# Altium PCB temperatureSensor.PcbDoc (part 1 of 3)
Units mm, origin at the board's own origin, x right, y up, seen from the top; angles counter-clockwise.
Board outline 80 x 46 mm, 2 copper layers (Top Layer, Bottom Layer); 50 components, 32 nets, 187 pads, 128 vias.
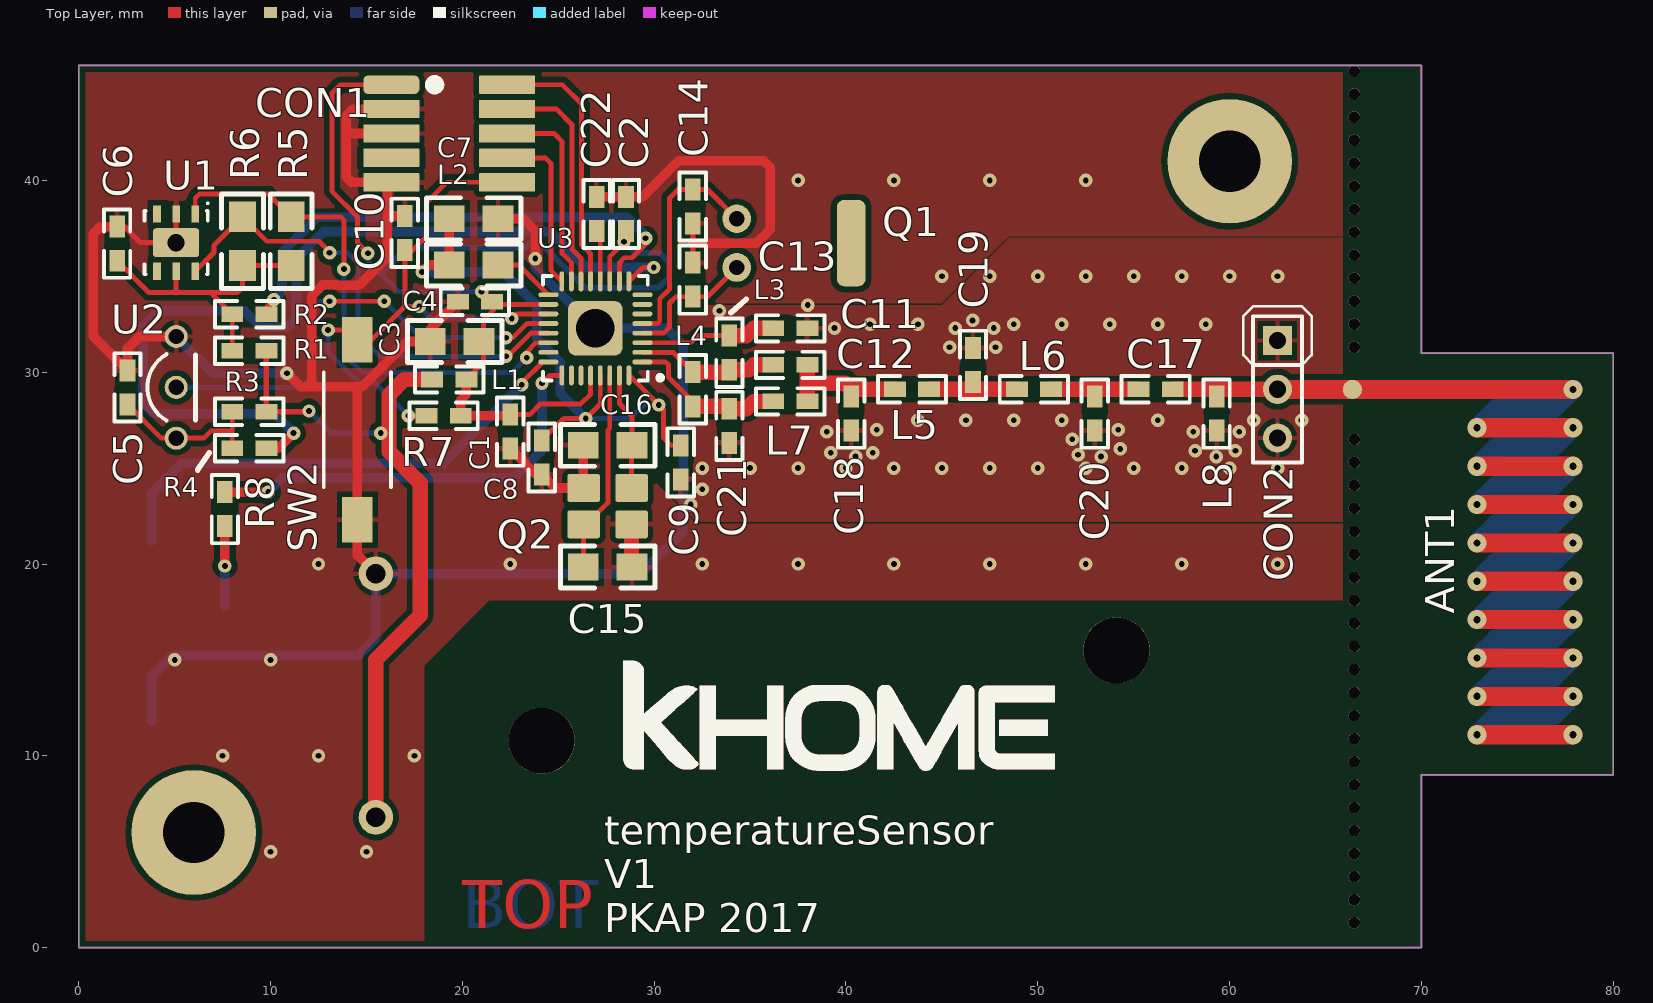
[diagram p0: Top Layer view]
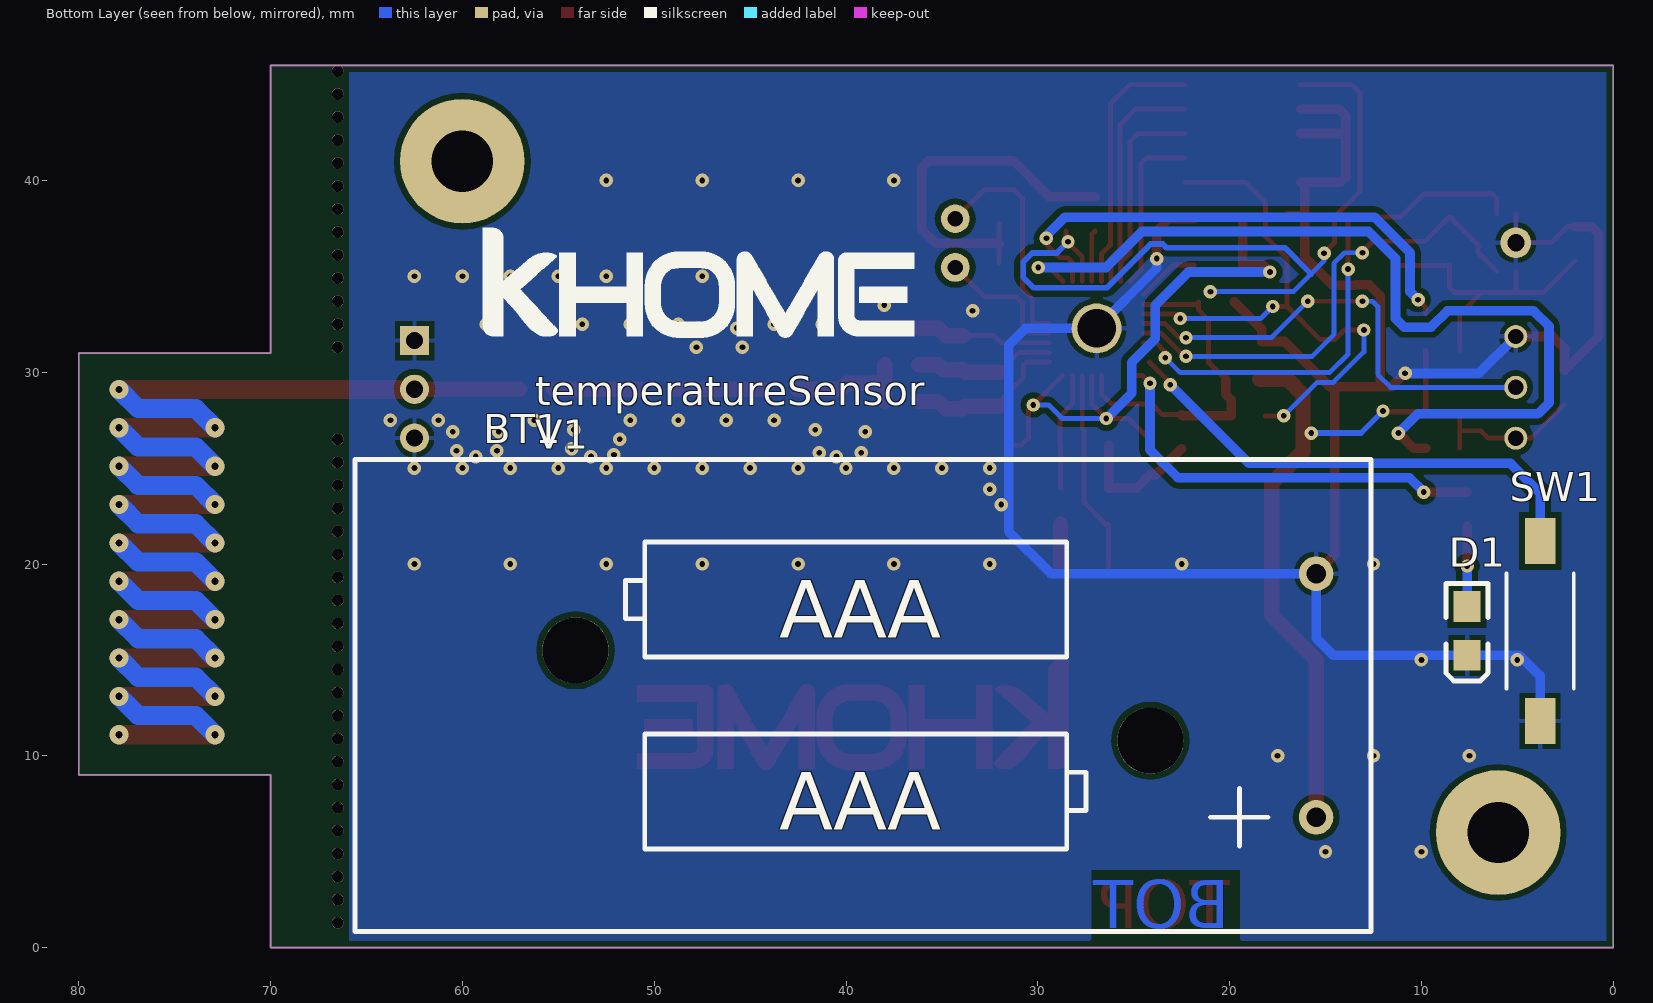
[diagram p1: Bottom Layer view, seen from below]

## Layer stack, top to bottom
Top Solder: solder mask 0.0102, Solder Resist, Dk 3.5
Top Layer: signal copper 0.0356
Dielectric 1: dielectric 0.32, FR-4, Dk 4.8
Bottom Layer: signal copper 0.0356
Bottom Solder: solder mask 0.0102, Solder Resist, Dk 3.5

## Board outline
0,0 70,0 70,9 80,9 80,31 70,31 70,46 0,46

## Design rules (kind name [scope] priority, off if disabled: settings)
BoardOutlineClearance [All] p1: gap=0.35
Clearance Clearance_1 [InPoly] p1: gap=0.3
Clearance [All] p2: gap=0.254
MaxMinImpedance [InNetClass('RF')] p1: minimum=49,00 maximum=51,00
PolygonConnect PolygonConnect_Via [All vs IsVia] p1: connectstyle=Direct reliefconductorwidth=0.254 reliefentries=4 polygonreliefangle="90 Angle" airgapwidth=0.254
PolygonConnect [All] p2: connectstyle=Relief reliefconductorwidth=0.254 reliefentries=4 polygonreliefangle="90 Angle" airgapwidth=0.254
RoutingVias [All] p1: holewidth=0.3 width=0.7 viastyle="Through Hole" minholewidth=0.3 minwidth=0.7 maxholewidth=15 maxwidth=15
SolderMaskExpansion [All] p1: expansion=0.102
Width [All] p1: maxlimit=10 minlimit=0.254 preferedwidth=0.4
30 further rules are at their usual default settings.

## Classes and differential pairs
net class RF: CC_RF_N CC_RF_P CC_RF_TX NetANT1_1 NetC12_1 NetC17_2 NetC19_1

## Components (designator, comment, footprint, x,y, rotation, side; value= is the part's Value field where it differs from the comment)
ANT1 "868 MHz" Ant-868-Helical 66.4,29.1 r0 top
BT1 "2x AAA" Keystone-2468 15.49,13.145 r180 bottom
C1 "100n" 0603_N 22.5,26.9 r90 top
C2 "100n" 0603_N 28.53,38.25 r270 top
C3 "22u" 0805_N 19.6,31.6 r0 top
C4 "100n" 0603_N 20.65,33.675 r0 top
C5 "100n" 0603_N 2.54,29.21 r270 top
C6 "100n" 0603_N 2,36.7 r270 top
C7 "22u" 0805_N 20.585,38 r180 top
C8 "100n" 0603_N 24.141,25.554 r90 top
C9 "100n" 0603_N 31.38,25.3 r90 top
C10 "100n" 0603_N 17,37.264 r270 top
C11 "100p" 0603_N 37.095,32.285 r0 top
C12 "3.3p" 0603_N 37.095,30.38 r180 top
C13 "10p" 0603_N 32.015,34.825 r270 top
C14 "10p" 0603_N 32.015,38.635 r90 top
C15 "15p" 0805_N 27.57,19.839 r180 top
C16 "15p" 0805_N 27.57,26.189 r0 top
C17 "1p" 0603_N 56.145,29.11 r180 top
C18 "2.7p" 0603_N 40.27,27.84 r270 top
C19 "6.2p" 0603_N 46.62,30.38 r90 top
C20 "3.0p" 0603_N 52.97,27.84 r270 top
C21 "3.3p" 0603_N 33.92,27.205 r90 top
C22 "1u" 0603_N 27.006,38.25 r270 top
CON1 "Cortex Debug" cortex-dbg 19.315,42.445 r0 top
CON2 "1x3" Header_254_1x3_male 62.495,31.65 r0 top
D1 "LED Red" 0805_LED 7.62,16.51 r270 bottom
L1 "Ferrite Bead" 0603_N 19.315,29.618 r0 top
L2 "6.8 µH" 0805_N 20.585,35.587 r180 top
L3 "8.2nH" 0603_N 33.92,31.015 r270 top
L4 "22nH" 0603_N 32.015,29.11 r270 top
L5 "6.8nH" 0603_N 43.445,29.11 r0 top
L6 "6.8nH" 0603_N 49.795,29.11 r0 top
L7 "8.2nH" 0603_N 37.095,28.475 r0 top
L8 "12nH" 0603_N 59.32,27.84 r90 top
Q1 "Crystal" AB38t 34.301,35.46 r0 top
Q2 "Quartz 20 MHz" LFXTAL058124 27.57,23.014 r0 top
R1 "DNP" 0603_N 8.89,31.115 r180 top
R2 "0R" 0603_N 8.89,33.02 r0 top
R3 "DNP" 0603_N 8.89,27.94 r180 top
R4 "0R" 0603_N 8.89,26.035 r0 top
R5 "10k" 0805_N 11.075,36.83 r90 top
R6 "10k" 0805_N 8.535,36.83 r90 top
R7 "100k" 0603_N 19.025,27.725 r180 top
R8 "1k" 0603_N 7.62,22.86 r270 top
SW1 "Push Button" FSMSM 3.81,16.51 r90 bottom
SW2 "Push Button" FSMSM 14.525,27 r90 top
U1 "Humidity & Temperature" SI7020-DFN6 5.075,36.755 r270 top
U2 "temperature sensor" LMT85-TO92 5.08,29.21 r270 top
U3 "CC1310" CC1310F128RHB-QFN32 26.935,32.285 r180 top

## Footprints (in the part's own frame and the unit in brackets; to place one, negate y for a bottom-side part, rotate by r counter-clockwise, add the part's x,y. Pads: shape width x height; smd on the part's side, far side on the other; paste and mask are expansions set on the pad)
0603_N [mil] "0603 normal hand soldering size"
  rect 45x32 smd: 1(-35,0) 2(35,0)
  silkscreen extent -70,-27 70,27, body extent -67,-24 67,24, height 22
0805_LED [mil] "0805 normal hand soldering size"
  rect 63x55 smd: A(-50,0) K(50,0)
  silkscreen extent -97,-43 102,43, body extent -94,-33 94,33, height 25
0805_N [mil] "0805 normal hand soldering size"
  rect 63x55 smd: 1(-50,0) 2(50,0)
  silkscreen extent -97,-43 97,43, body extent -94,-33 94,33, height 25
AB38t [mm]
  round 1.5 hole 0.8: 1(0,0) 2(0,2.54)
  rrect50% 1.5x4.5 smd: 3(5.969,1.27)
  body extent 2.54,-0.33 10.84,2.87, height 3.2
Ant-868-Helical [mm] "868 MHz Helical PCB Antenna"
  round 1 smd: 1(0,0)
  Top Layer lines w1: 0,0 0.35,0 11.5,0 ; 6.5,-18 11.5,-18 ; 6.5,-14 11.5,-14 ; 6.5,-12 11.5,-12 ; 6.5,-10 11.5,-10 ; 6.5,-8 11.5,-8 ; 6.5,-6 11.5,-6 ; 6.5,-4 11.5,-4 ; 6.5,-2 11.5,-2 ; 6.5,-16 11.5,-16 6.5,-16
  Bottom Layer lines w1: 6.5,-18 7.5,-17 10.5,-17 11.5,-16 ; 6.5,-16 7.5,-15 10.5,-15 11.5,-14 ; 6.5,-14 7.5,-13 10.5,-13 11.5,-12 ; 6.5,-12 7.5,-11 10.5,-11 11.5,-10 ; 6.5,-10 7.5,-9 10.5,-9 11.5,-8 ; 6.5,-8 7.5,-7 10.5,-7 11.5,-6 ; 6.5,-6 7.5,-5 10.5,-5 11.5,-4 ; 6.5,-4 7.5,-3 10.5,-3 11.5,-2 ; 6.5,-2 7.5,-1 10.5,-1 11.5,0
CC1310F128RHB-QFN32 [mm] "QFN, 32-Leads, Body 5,00x5,00mm, Pitch 0,50mm, Thermal Pad 3,45x3,45mm, IPC Low Density"
  oval 1.05x0.25 smd: 1(-2.45,1.75) 2(-2.45,1.25) 3(-2.45,0.75) 4(-2.45,0.25) 5(-2.45,-0.25) 6(-2.45,-0.75) 7(-2.45,-1.25) 8(-2.45,-1.75) 17(2.45,-1.75) 18(2.45,-1.25) 19(2.45,-0.75) 20(2.45,-0.25) 21(2.45,0.25) 22(2.45,0.75) 23(2.45,1.25) 24(2.45,1.75)
  oval 0.25x1.05 smd: 9(-1.75,-2.45) 10(-1.25,-2.45) 11(-0.75,-2.45) 12(-0.25,-2.45) 13(0.25,-2.45) 14(0.75,-2.45) 15(1.25,-2.45) 16(1.75,-2.45) 25(1.75,2.45) 26(1.25,2.45) 27(0.75,2.45) 28(0.25,2.45) 29(-0.25,2.45) 30(-0.75,2.45) 31(-1.25,2.45) 32(-1.75,2.45)
  rrect30% 2.85x2.85 / inner round 2.6 / far side round 2.6 hole 2: G(0,0)
  silkscreen extent -3.5,-2.73 2.73,2.73, body extent -2.63,-2.63 2.63,2.63, height 1
cortex-dbg [mm]
  rrect50% 2.92x0.95 smd: 1(-3.02,2.54)
  rrect5% 2.92x0.95 smd: 2(3.02,2.54) 3(-3.02,1.27) 4(3.02,1.27) 5(-3.02,0) 6(3.02,0) 7(-3.02,-1.27) 8(3.02,-1.27) 9(-3.02,-2.54) 10(3.02,-2.54)
  silkscreen extent -1.02,2.29 -0.51,2.79, body extent -2.92,-3.18 2.92,3.17, height 6.16
FSMSM [mm]
  rect 2.39x1.6 smd: 1(-4.695,0) 2(4.695,0)
  silkscreen extent -3,-1.75 3,1.75, body extent -4.98,-1.75 4.98,1.75, height 4.45
Header_254_1x3_male [mil]
  rect 60x60 hole 35: 1(0,0)
  round 60 hole 35: 2(0,-100) 3(0,-200)
  silkscreen extent -70,-250 70,70, body extent -49,-250 50,49, height 402
Keystone-2468 [mm] "Double AAA battery holder"
  round 1.8 hole 1.02: N(0,6.35) P(0,-6.35)
  round 3.45 hole 3.45 unplated: NC(-38.61,2.35) NC(-8.64,-2.35)
  silkscreen extent -50.12,-12.29 2.87,12.29, body extent -50.12,-12.3 2.86,12.29, height 13.43
LFXTAL058124 [mm] "Crystal SMD 3.2x2.5mm"
  rrect15% 1.7x1.45 smd: G(-1.25,0.95) G(1.25,-0.95) Q1(1.25,0.95) Q2(-1.25,-0.95)
  body extent -1.7,-1.35 1.7,1.35, height 0.8
LMT85-TO92 [mm] "TO92 Package"
  round 1.2 hole 0.8: 1(-2.65,0) 2(0,0) 3(2.65,0)
  silkscreen extent -1.73,-1.5 1.73,1
SI7020-DFN6 [mm] "SON, 6-Leads, Body 3,00x3,00mm, Pitch 1,00mm, Thermal Pad 2,40x1,50mm, IPC Low Density"
  rect 0.9x0.4 smd: 1(-1.49,1) 2(-1.49,0) 3(-1.49,-1) 4(1.49,-1) 5(1.49,0) 6(1.49,1)
  rrect20% 1.5x2.4 / inner round 1.6 / far side round 1.6 hole 0.9: 7(0,0)
  silkscreen extent -2.1,-1.65 1.65,1.7, body extent -1.5,-1.5 1.5,1.5, height 1.21

## Part data
ANT1: library part ANT-868-Helical, "868 MHz Helical PCB Antenna, see TI swra416.pdf"
BT1: library part Battery-AAA-Double, "Double AAA Battery Holder"
C1 C2 C4 C5 C6 C8 C9 C10: library part 100n_50V_0603, "100n 50V 0603"
C3 C7: library part 22u_25V_0805, "22u 25V 0805"
C11: library part 100p_50V_0603, "100p 50V 0603"
C12 C21: library part 3p3_50V_0603, "3p3 50V 0603"
C13 C14: library part 10p_50V_0603, "10p 50V 0603"
C15 C16: library part 10p_50V_0805, "15p 50V 0805"
C17: library part 100p_50V_0603, "1p 50V 0603"
C18: library part 3p3_50V_0603, "2p7 50V 0603"
C19: library part 3p3_50V_0603, "6p2 50V 0603"
C20: library part 3p3_50V_0603, "3p 50V 0603"
C22: library part 1u_50V_0603, "1u 50V 0603"
CON1: library part Cortex-DBG
CON2: library part Header_1x03_male, "Male Connector 1x3"
D1: library part LED-STD-RED-0805, "Standard LED Red 0805"
L1: library part Inductor_General_Purpose_0603
L2: library part Inductor_General_Purpose_0603, "Chip Inductor 0805"
L3 L7: library part Inductor_General_Purpose_0603, "8.2nH Inductor"
L4: library part Inductor_General_Purpose_0603, "22nH Inductor"
L5 L6: library part Inductor_General_Purpose_0603, "6.8H Inductor"
L8: library part Inductor_General_Purpose_0603, "Inductor for PCB Antenna compensation"
Q1: library part AB38T-32.768KHZ, "AB38T-32.768KHZ"
Q2: library part LFXTAL058124, "Standard 3.2 x 2.5mm SMD crystal in a ceramic package with a  seam sealed metal lid, hermetically sealed."
R1 R2 R3 R4: library part 0R_100mW_0603, "0R 100mW 0603"
R5 R6: library part 10k_125mW_0805, "10k 125mW 0805"
R7: library part 100k_100mW_0603, "100k 100mW 0603"
R8: library part 1k_100mW_0603, "1k 100mW 0603"
SW1 SW2: library part Switch-FSMSM, "Taster, Nicht beleuchtet, 24 V, 50 mA, 180 gf, Baureihe FSMSM, AlcoSwitch"
U1: library part SI7020, "I2C HUMIDITY AND TEMPERATURE SENSOR"
U2: library part LMT85-TO92, "Analog Temperature Sensors with Class-AB Output"
U3: library part CC1310F128RHB, "CC1310 SimpleLink™ Ultra-Low-Power Sub-1 GHz Wireless MCU"

## Free pads (board coordinates)
  round 0.6 hole 0.6 unplated mask+0: 0(66.5,1.3) 0(66.5,2.5) 0(66.5,3.7) 0(66.5,4.9) 0(66.5,6.1) 0(66.5,7.3) 0(66.5,8.5) 0(66.5,9.7) 0(66.5,10.9) 0(66.5,12.1) 0(66.5,13.3) 0(66.5,14.5) 0(66.5,15.7) 0(66.5,16.9) 0(66.5,18.1) 0(66.5,19.3) 0(66.5,20.5) 0(66.5,21.7) 0(66.5,22.9) 0(66.5,24.1) 0(66.5,25.3) 0(66.5,26.5) 0(66.5,31.3) 0(66.5,32.5) 0(66.5,33.7) 0(66.5,34.9) 0(66.5,36.1) 0(66.5,37.3) 0(66.5,38.5) 0(66.5,39.7) 0(66.5,40.9) 0(66.5,42.1) 0(66.5,43.3) 0(66.5,44.5) 0(66.5,45.7)
  round 6.5 hole 3.2 unplated: MOUNT1(6,6) MOUNT2(60,41)

## Via types
v1: diameter 0.7, hole 0.3, Top Layer to Bottom Layer, tented both sides, 109 vias
v2: diameter 1, hole 0.38, Top Layer to Bottom Layer, tented both sides, 19 vias

## Nets (pads, with @x,y where several pads share a name; then routed paths per layer and width w, separated by ;. In a path a pad name is that pad's centre, name@x,y a point inside that pad or via, vN(x,y) a via of type N, cw(c..) or ccw(c..) an arc to the next point about the centre after c; other vN are vias at no path point)
3V3: BT1.P L1.1 R1.1 R3.1 | length 35.9
  Top Layer w0.3: R1.1@9.779,31.115 R3.1@9.779,27.94 12.04,27.94 v1(12.005,27.975)
  Top Layer w0.8: BT1.P@15.49,6.795 15.49,15.015 17.8,17.325 17.8,24.225 16.171,25.854 16.171,28.821 16.968,29.618 L1.1@18.426,29.618
  Bottom Layer w0.3: v1(12.005,27.975) 13.155,26.825 v1(15.75,26.825)
CC_RF_N: C12.2 L3.2 L4.1 U3.2 | length 7.4
  Top Layer w0.254: U3.2@29.385,31.035 30.979,31.035 L4.1@32.015,29.999 ; L3.2@33.793,29.999 L3.2@33.92,30.126
  Top Layer w0.8: L4.1@32.015,29.999 L3.2@33.793,29.999 ; L3.2@33.92,30.126 34.936,30.126 35.19,30.38 C12.2@36.206,30.38
CC_RF_P: C21.2 L4.2 L7.1 U3.1 | length 8.5
  Top Layer w0.254: U3.1@29.385,30.535 30.59,30.535 ; 30.59,30.527 30.598,30.527 30.745,30.38 30.745,29.745 32.015,28.475 L4.2@32.015,28.221 ; C21.2@33.793,28.221 C21.2@33.92,28.094
  Top Layer w0.8: L4.2@32.015,28.221 C21.2@33.793,28.221 ; C21.2@33.92,28.094 34.809,28.094 35.19,28.475 L7.1@36.206,28.475
CC_RF_TX: C11.1 L3.1 U3.3 | length 7.1
  Top Layer w0.254: U3.3@29.385,31.535 31.9,31.535 32.269,31.904 L3.1@33.92,31.904
  Top Layer w0.8: L3.1@33.92,31.904 34.809,31.904 35.19,32.285 C11.1@36.206,32.285
DCDC_SW: L2.1 U3.17 | length 3.3
  Top Layer w0.254: L2.1@21.855,35.587 22.933,35.587 U3.17@24.485,34.035
GND: BT1.N C1.1 C2.1 C3.1 C4.1 C5.1 C6.1 C7.1 C8.1 C9.1 C10.1 C11.2 C13.1 C14.1 C15.1 C16.1 C18.2 C19.2 C20.2 C21.1 C22.1 CON1.3 CON1.5 CON1.9 CON2.1 CON2.3 D1.K L8.1 Q2.G SW1.1 SW2.1 U1.2 U1.7 U2.1 U3.G | length 158.3
  Top Layer w0.254: C6.1@2,37.589 2.386,37.589 3.22,36.755 U1.7@5.075,36.755 U1.2@5.075,38.245 ; C15.1@28.82,19.859 C15.1@28.84,19.839 ; C13.1@32.015,35.714 32.015,36.7 C14.1@32.015,37.746
  Top Layer w0.5: C6.1@2,37.589 1.139,37.589 0.75,37.2 0.75,31.889 C5.1@2.54,30.099 2.54,31.24 3.16,31.86 U2.1@5.08,31.86 ; v1(10.85,29.95) 11.55,29.25 12.1,29.25 ; BT1.N@15.49,19.495 14.525,20.46 SW2.1@14.525,22.305 14.525,29.15 14.425,29.25 ; CON1.9@16.295,39.905 CON1.9@16.09,39.905 ; CON1.5@16.295,42.445 13.995,42.445 13.95,42.4 ; CON1.3@16.295,43.715 14.29,43.715 13.95,43.375 13.95,42.4 ; C10.1@17,38.153 16.118,38.153 16.09,38.125 ; C4.1@19.761,33.675 18.33,32.244 C3.1@18.33,31.6 17.138,31.6 14.788,29.25 14.425,29.25 ; C7.1@21.855,38 23.175,38 23.8,37.375 v1(23.8,35.925) ; C1.1@22.5,26.011 23.846,24.665 C8.1@24.141,24.665 24.842,23.964 Q2.G@26.32,23.964 26.3,23.984 C16.1@26.3,26.189 ; C22.1@27.006,39.139 C2.1@28.53,39.139 29.389,39.139 31.275,41.025 35.7,41.025 36.05,40.675 36.05,37.45 35.314,36.714 32.029,36.714 32.015,36.7 ; 12.1,29.25 12.146,29.296 12.146,33.98 12.722,34.556 13.429,34.556 13.462,34.523 14.605,34.523 16.09,36.007 16.09,38.125 ; 12.1,29.25 14.425,29.25 ; 13.95,42.4 13.95,40.175 14.22,39.905 CON1.9@16.09,39.905 ; 16.09,38.125 CON1.9@16.09,39.905
  Top Layer w0.8: C15.1@28.82,19.859 Q2.G@28.82,22.064
  Bottom Layer w0.5: SW1.1@3.81,11.815 3.81,14.16 4.89,15.24 D1.K@7.62,15.24 14.59,15.24 15.49,16.14 BT1.N@15.49,19.495 29.32,19.495 31.525,21.7 31.525,31.4 30.64,32.285 U3.G@26.935,32.285 23.8,35.42 v1(23.8,35.925) ; U2.1@5.08,31.86 6.99,29.95 v1(10.85,29.95)
  other v1: 10,5 15,5 7.5,10 12.5,10 17.5,10 5,15 10,15 12.5,20 22.5,20 32.5,20 37.5,20 42.5,20 47.5,20 52.5,20 57.5,20 62.5,20 31.9,23.1 32.5,23.9 32.5,25 35,25 37.5,25 40,25 42.5,25 45,25 47.5,25 50,25 52.5,25 55,25 57.5,25 60,25 62.5,25 40.5,25.6 53.3,25.6 59.3,25.6 52.1,25.7 39.2,25.8 41.4,25.8 58.2,25.9 60.3,25.9 54.3,26 51.8,26.5 39,26.9 58.1,26.9 60.5,26.9 41.6,27 54.2,27 43.75,27.5 46.25,27.5 48.75,27.5 51.25,27.5 56.25,27.5 61.25,27.5 63.75,27.5 45.4,31.3 47.8,31.3 39.4,32.3 45.7,32.3 47.7,32.3 41.25,32.5 43.75,32.5 48.75,32.5 51.25,32.5 53.75,32.5 56.25,32.5 58.75,32.5 46.6,32.7 33.4,33.2 38,33.5 45,35 47.5,35 50,35 52.5,35 55,35 57.5,35 60,35 62.5,35 37.5,40 42.5,40 47.5,40 52.5,40
JTAG_TCK: CON1.4 U3.14 | length 12.1
  Top Layer w0.254: CON1.4@22.335,43.715 24.91,43.715 25.711,42.914 25.711,36.421 26.177,35.955 26.177,35.94 ; U3.14@26.185,34.735 26.185,35.94
JTAG_TDI: CON1.8 U3.16 | length 8.8
  Top Layer w0.254: CON1.8@22.335,41.175 24.325,41.175 24.625,40.875 24.625,35.295 U3.16@25.185,34.735
JTAG_TDO: CON1.6 U3.15 | length 10.5
  Top Layer w0.254: CON1.6@22.335,42.445 24.78,42.445 25.203,42.022 25.203,36.196 25.677,35.722 25.677,35.69 ; U3.15@25.685,34.735 25.685,35.69
JTAG_TMS: CON1.2 U3.13 | length 13.7
  Top Layer w0.254: CON1.2@22.335,44.985 25.215,44.985 26.219,43.981 26.219,36.632 26.442,36.408 26.458,36.408 26.677,36.19 ; U3.13@26.685,34.735 26.685,36.19
LMT_SNS: U2.2 U3.20 | length 24.4
  Top Layer w0.254: v1(13.076,33.702) 15.923,33.702 v1(15.925,33.7) ; v1(22.275,31.8) 22.625,31.8 23.352,32.527 23.36,32.527 ; 23.36,32.535 U3.20@24.485,32.535
  Bottom Layer w0.254: U2.2@5.08,29.21 11.61,29.21 12.269,29.869 12.269,33.419 12.552,33.702 v1(13.076,33.702) ; v1(15.925,33.7) 17.825,31.8 v1(22.275,31.8)
NetANT1_1: ANT1.1 C17.1 CON2.2 L8.2 | length 9.7
  Top Layer w0.8: C17.1@57.034,29.11 CON2.2@62.495,29.11
  Top Layer w1: CON2.2@62.495,29.11 62.505,29.1 ANT1.1@66.4,29.1 ANT1.1@66.75,29.1
  other v2: 72.9,11.1 77.9,11.1 72.9,13.1 77.9,13.1 72.9,15.1 77.9,15.1 72.9,17.1 77.9,17.1 72.9,19.1 77.9,19.1 72.9,21.1 77.9,21.1 72.9,23.1 77.9,23.1 72.9,25.1 77.9,25.1 72.9,27.1 77.9,27.1 77.9,29.1
NetC5_2: C5.2 R3.2 R4.1 U2.3 | length 8.2
  Top Layer w0.254: C5.2@2.54,28.321 4.301,26.56 U2.3@5.08,26.56 6.51,26.56 6.9,26.95 7.975,26.95 ; R4.1@8.001,26.035 R3.2@8.001,27.94
NetC6_2: C6.2 R1.2 R2.1 R5.1 R6.1 U1.5 | length 15.6
  Top Layer w0.254: C6.2@2,35.811 3.661,34.15 5.125,34.15 ; U1.5@5.075,35.265 5.075,34.2 5.125,34.15 ; R1.2@8.001,31.115 R2.1@8.001,33.02 6.871,34.15 ; R5.1@11.075,35.56 R6.1@8.535,35.56 8.535,34.435 8.25,34.15 6.871,34.15 ; 5.125,34.15 6.871,34.15
NetC12_1: C12.1 C18.1 L5.1 L7.2 | length 6.6
  Top Layer w0.8: L7.2@37.984,28.475 37.984,29.428 ; C12.1@37.984,30.38 37.984,29.428 ; L5.1@42.556,29.11 40.27,29.11 39.953,29.428 37.984,29.428
NetC13_2: C13.2 Q1.1 U3.4 | length 7.1
  Top Layer w0.254: U3.4@29.385,32.035 30.495,32.035 30.799,32.339 30.799,33.609 31.126,33.936 C13.2@32.015,33.936 32.777,33.936 Q1.1@34.301,35.46
NetC14_2: C14.2 Q1.2 U3.5 | length 11.9
  Top Layer w0.254: U3.5@29.385,32.535 30.172,32.535 30.291,32.654 30.291,33.819 30.8,34.328 30.8,39.075 31.249,39.524 C14.2@32.015,39.524 32.777,39.524 Q1.2@34.301,38
NetC15_2: C15.2 Q2.Q2 U3.30 | length 10.7
  Top Layer w0.254: C15.2@26.3,19.839 26.32,19.859 Q2.Q2@26.32,22.064 26.47,22.064 27.589,23.183 27.589,26.975 27.685,27.071 U3.30@27.685,29.835
NetC16_2: C16.2 Q2.Q1 U3.31 | length 6.1
  Top Layer w0.254: 28.185,29.13 U3.31@28.185,29.835 ; 28.193,29.13 28.193,28.36 28.84,27.713 C16.2@28.84,26.189 28.82,26.169 Q2.Q1@28.82,23.964
NetC17_2: C17.2 C20.1 L6.2 | length 4.6
  Top Layer w0.8: L6.2@50.684,29.11 C17.2@55.256,29.11
NetC19_1: C19.1 L5.2 L6.1 | length 4.6
  Top Layer w0.8: L5.2@44.334,29.11 L6.1@48.906,29.11
NetC22_2: C22.2 U3.12 | length 2.7
  Top Layer w0.254: C22.2@27.006,37.361 27.185,37.182 U3.12@27.185,34.735
NetD1_A: D1.A R8.2 | length 4.2
  Top Layer w0.5: v1(7.62,19.895) R8.2@7.62,21.971
  Bottom Layer w0.5: D1.A@7.62,17.78 v1(7.62,19.895)
PRG_KEY: SW1.2 U3.24 | length 25.9
  Top Layer w0.254: v1(23.099,29.351) 23.099,29.449 U3.24@24.175,30.525
  Bottom Layer w0.254: v1(23.099,29.351) v1@23.099,29.529
  Bottom Layer w0.5: SW1.2@3.81,21.205 3.81,23.71 5.35,25.25 18.997,25.25 v1(23.099,29.351)
PRG_LED: R8.1 U3.25 | length 22.1
  Top Layer w0.254: v1(24.15,29.425) 24.56,29.835 U3.25@25.185,29.835
  Top Layer w0.5: R8.1@7.62,23.749 R8.1@7.62,23.749 v1(9.875,23.75)
  Bottom Layer w0.5: v1(9.875,23.75) 10.621,24.496 22.696,24.496 24.15,25.95 v1(24.15,29.425)
RST: C10.2 CON1.10 R7.2 SW2.2 U3.19 | length 31
  Top Layer w0.254: v1(13,32.2) 14.02,32.2 SW2.2@14.525,31.695 15.27,31.695 17,33.425 ; v1(17.175,27.725) R7.2@18.136,27.725 ; v1(17.75,33.425) 17,33.425 ; CON1.10@22.335,39.905 19.183,39.905 18.134,38.856 18.134,37.084 17,35.95 17,33.425 ; v1(22.575,32.8) 22.81,33.035 U3.19@24.485,33.035
  Bottom Layer w0.254: v1(13,32.2) 13,31.057 14.59,29.467 15.433,29.467 v1(17.175,27.725) ; v1(17.75,33.425) 18.375,32.8 v1(22.575,32.8)
SCL: R6.2 U1.6 U3.21 | length 25.5
  Top Layer w0.254: U1.6@6.075,35.265 7.05,36.24 7.05,36.615 R6.2@8.535,38.1 9.81,36.825 12.525,36.825 13.076,36.274 v1(13.076,36.227) ; v1(22.275,30.825) 22.368,30.825 23.564,32.02 ; 23.585,32.035 U3.21@24.485,32.035
  Bottom Layer w0.254: v1(13.076,36.227) 14.009,36.227 14.567,35.669 14.567,31.958 15.7,30.825 v1(22.275,30.825)
SDA: R5.2 U1.1 U3.22 | length 28.1
  Top Layer w0.254: U1.1@6.075,38.245 6.075,39.075 6.281,39.281 9.894,39.281 R5.2@11.075,38.1 13.65,38.1 13.826,37.924 v1(13.826,35.377) ; v1(23.35,30.75) 23.35,31.05 23.835,31.535 U3.22@24.485,31.535
  Bottom Layer w0.254: v1(13.826,35.377) 13.826,30.949 14.8,29.975 22.575,29.975 v1(23.35,30.75)
VCC_LMT: R4.2 U3.9 | length 47.8
  Top Layer w0.254: U3.9@28.685,34.735 29.41,35.46 v1(29.983,35.46)
  Top Layer w0.5: R4.2@9.779,26.035 10.41,26.035 v1(11.2,26.825)
  Bottom Layer w0.5: v1(11.2,26.825) 10.2,27.825 3.925,27.825 3.35,28.4 3.35,32.4 4.15,33.2 8.65,33.2 9.5,32.35 10.9,32.35 11.35,32.8 11.35,35.925 12.758,37.333 24.567,37.333 26.44,35.46 v1(29.983,35.46)
VCC_SI: R2.2 U3.10 | length 26.9
  Top Layer w0.254: R2.2@9.779,33.02 9.779,33.379 v1(10.175,33.775) ; U3.10@28.185,34.735 28.185,35.714 ; 28.19,35.709 28.449,35.968 28.843,35.968 29.551,36.676 v1(29.551,36.977)
  Bottom Layer w0.5: v1(10.175,33.775) 10.596,34.196 10.596,36.237 12.446,38.087 28.588,38.087 29.551,37.124 v1(29.551,36.977)
VDDR: C7.2 C8.2 C9.2 L2.2 U3.29 U3.32 | length 32.1
  Top Layer w0.254: C8.2@24.141,26.443 25.284,27.586 v1(26.427,27.586) 27.185,28.344 U3.29@27.185,29.835 ; U3.32@28.693,29.835 28.693,29.833 v1(30.237,28.289) 30.491,28.035 30.491,26.57 30.872,26.189 C9.2@31.38,26.189
  Top Layer w0.5: v1(17.9,35.225) 18.262,35.587 L2.2@19.315,35.587 C7.2@19.315,38
  Bottom Layer w0.254: v1(26.427,27.586) 28.736,27.586 29.439,28.289 v1(30.237,28.289)
  Bottom Layer w0.5: v1(17.9,35.225) 22.15,35.225 23.875,33.5 23.875,31.75 25.1,30.525 25.1,28.913 v1(26.427,27.586)
VDDS: C1.2 C2.2 C3.2 C4.2 CON1.1 L1.2 R7.1 U3.11 U3.18 U3.28 | length 60.6
  Top Layer w0.254: v1(15.075,36.2) 14.533,36.742 14.533,38.11 13.2,39.443 13.2,44.55 13.635,44.985 CON1.1@16.295,44.985 ; L1.2@20.204,29.618 21.093,30.507 21.093,32.718 21.614,33.239 21.614,33.675 21.754,33.535 U3.18@24.485,33.535 ; C1.2@22.5,27.789 23.514,27.789 24.073,28.348 26.173,28.348 26.685,28.86 U3.28@26.685,29.835 ; U3.11@27.685,34.735 27.685,36.01 28.53,36.855 C2.2@28.53,37.361
  Top Layer w0.5: L1.2@20.204,29.618 20.204,28.854 19.914,28.564 R7.1@19.914,27.725 22.436,27.725 C1.2@22.5,27.789
  Bottom Layer w0.254: v1(15.075,36.2) 15.075,35.8 15.75,35.125 16.675,34.2 v1(21,34.2)
  Bottom Layer w0.3: 15.75,35.125 17.117,36.492 23.301,36.492 23.488,36.679 24.112,36.679 26.391,34.4 30.225,34.4 30.762,34.938 30.762,35.747 30.295,36.214 29.011,36.214 v1(28.425,36.8)
pads on no net: BT1.NC CON1.7 Q1.3 U1.3 U1.4 U3.6 U3.7 U3.8 U3.23 U3.26 U3.27
copper on no net: | length 2148.1